# EAGLE board FlyballETS-LIGHTS (EAGLE 7.5.0)
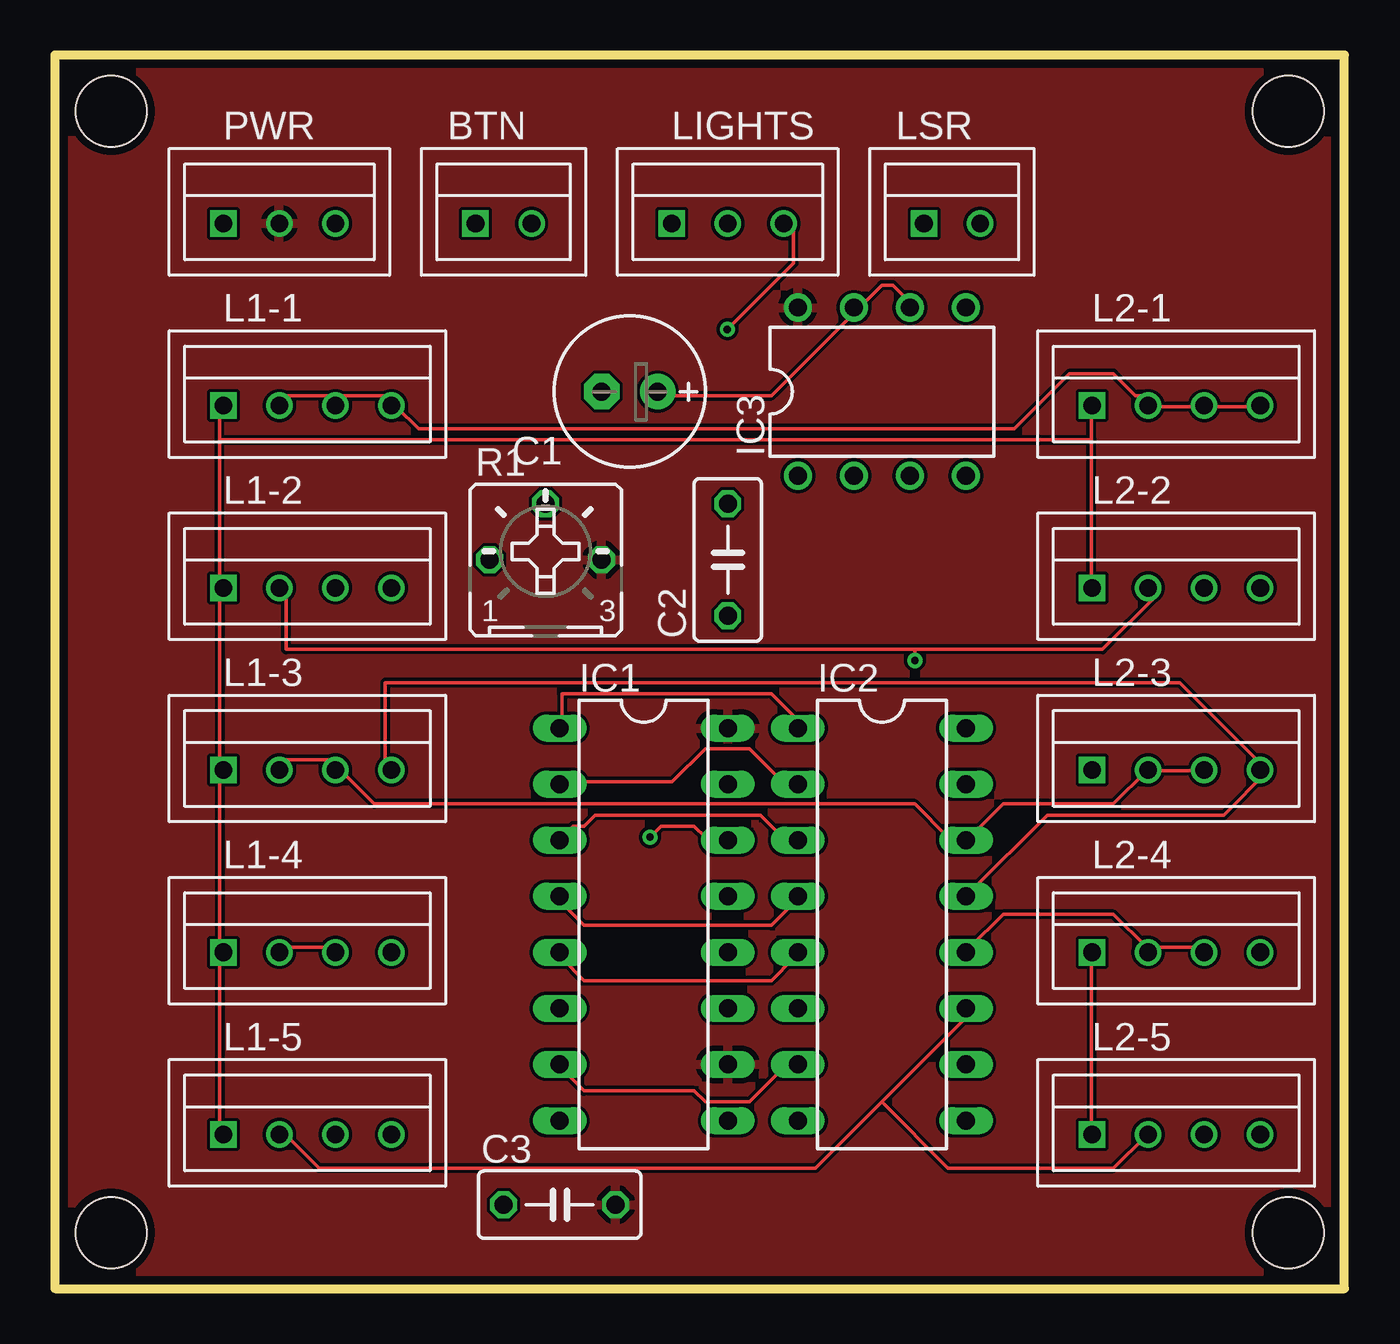
[diagram p0: board, top side]
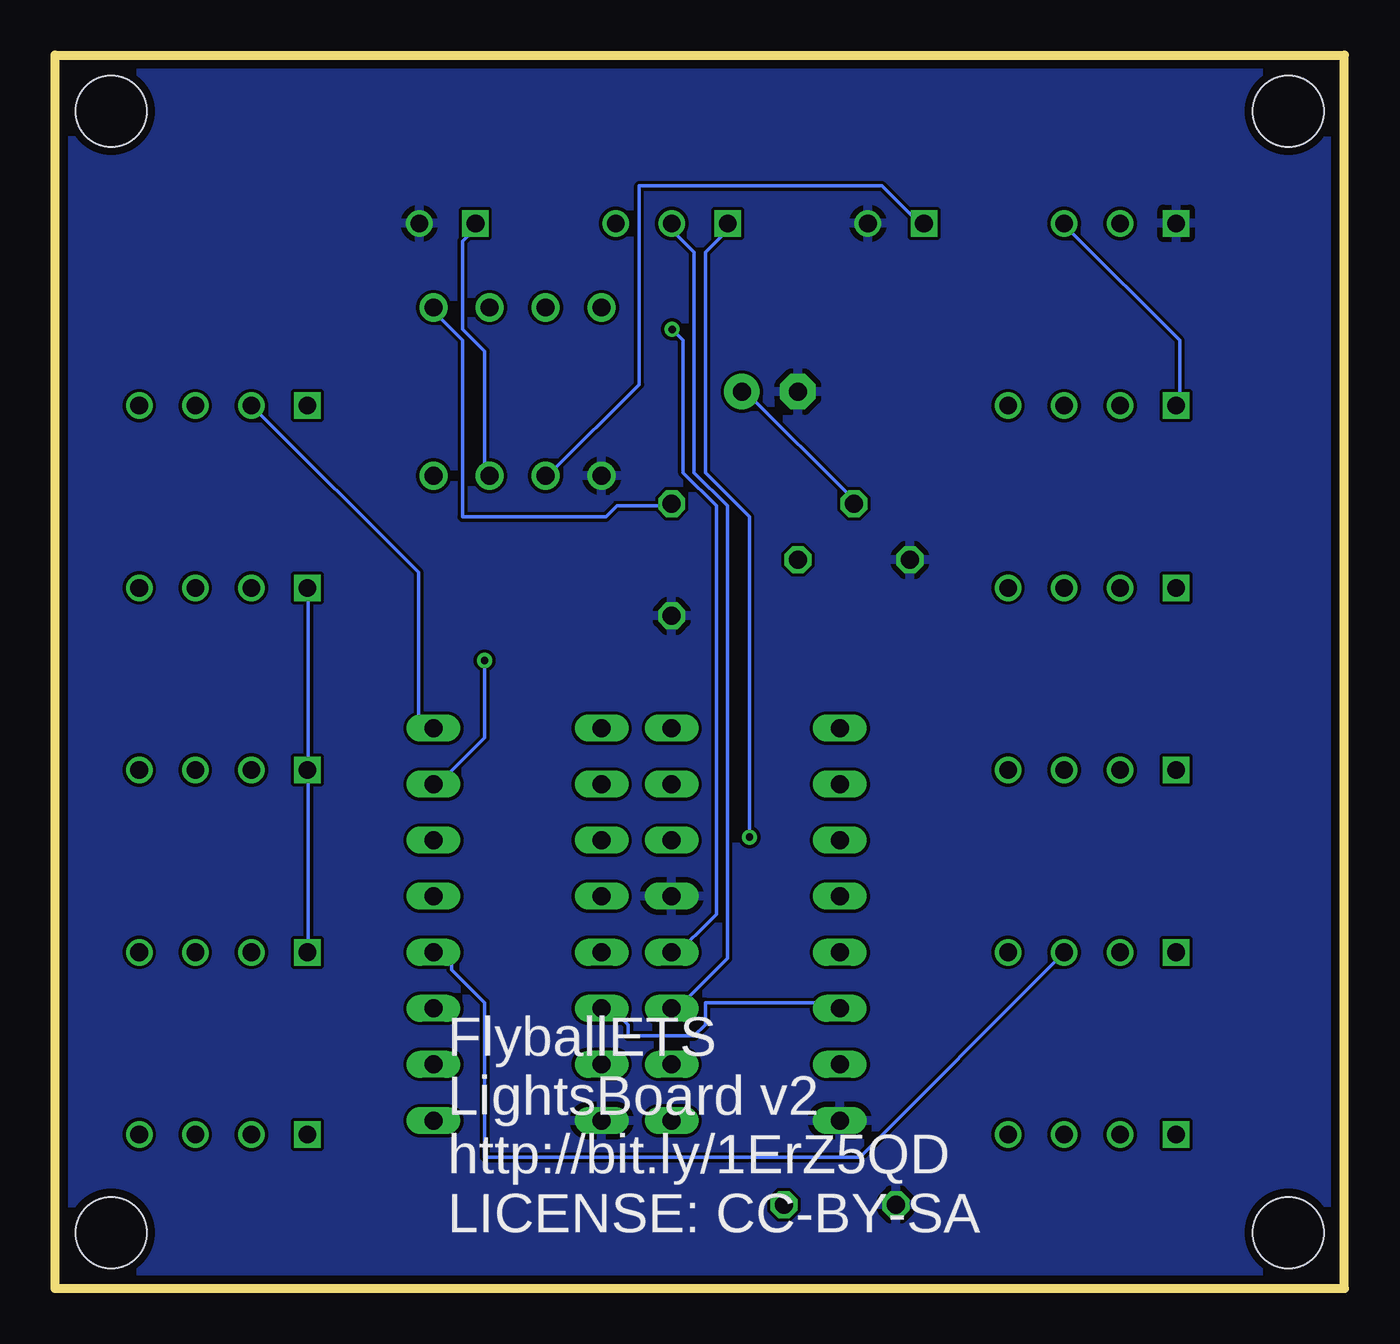
[diagram p1: board, bottom side, seen from below]

Size 58.42 x 55.88 mm. Coordinates in mm from the lower left corner, seen from the top.
Outline: 58.42,0 58.42,55.88 0,55.88 0,0 58.42,0
Copper layers (1*16): Top 0.0356mm / dielectric 1.5011mm / Bottom 0.0356mm
Design rules "LaenPCBOrder": minimum track width 6mil, minimum drill 13mil, track to track 6mil, track to pad 6mil, pad to pad 6mil, via to via 6mil, smd to smd 6mil, copper to edge 15mil, drill to drill 6mil, minimum pad ring 7mil, minimum via ring 7mil, stop-mask expansion 3mil, vias tented up to drill 0mil, thermal gap 10mil
Holes 3.2 mm at 2.54,53.34 2.54,2.54 55.88,2.54 55.88,53.34

## Footprints (pad centres in the part's own frame; a part is rotated, then mirrored left to right if it is on the bottom)
B2B-XH = drill 0.8 square: P$1 -2.54,0 | drill 0.8: P$2 0,0
E2,5-7 = drill 0.813 pad 1.6: + -1.27,0 | drill 0.813 pad 1.6 octagon: - 1.27,0
C050-030X075 = drill 0.813 octagon: 1 -2.54,0; 2 2.54,0
DIL16 = drill 0.813 long: 1 -8.89,-3.81; 2 -6.35,-3.81; 3 -3.81,-3.81; 4 -1.27,-3.81; 5 1.27,-3.81; 6 3.81,-3.81; 7 6.35,-3.81; 8 8.89,-3.81; 9 8.89,3.81; 10 6.35,3.81; 11 3.81,3.81; 12 1.27,3.81; 13 -1.27,3.81; 14 -3.81,3.81; 15 -6.35,3.81; 16 -8.89,3.81
DIL08 = drill 0.813 pad 1.27: 1 -3.81,-3.81; 2 -1.27,-3.81; 3 1.27,-3.81; 4 3.81,-3.81; 5 3.81,3.81; 6 1.27,3.81; 7 -1.27,3.81; 8 -3.81,3.81
B4B-XH = drill 0.8 square: P$1 -3.81,0 | drill 0.8: P$2 -1.27,0; P$3 1.27,0; P$4 3.81,0
B3B-XH = drill 0.8 square: P$1 -2.54,0 | drill 0.8: P$2 0,0; P$3 2.54,0
B25P = drill 0.813 octagon: A -2.54,0; E 2.54,0; S 0,2.54

## Placement (x,y rotation side)
BTN  02-JST-B2B-XH-A  [B2B-XH]  21.59,48.26 0 top
C1  100uF  [E2,5-7]  26.04,40.64 180 top
C2  10nF  [C050-030X075]  30.48,33.02 90 top
C3  100nF  [C050-030X075]  22.86,3.81 0 top
IC1  74HC595N  [DIL16]  26.67,16.51 270 top
IC2  ULN2003AN  [DIL16]  37.47,16.51 270 top
IC3  LM555N  [DIL08]  37.47,40.64 0 top
L1-1  04-JST-B4B-XH-A  [B4B-XH]  11.43,40.01 0 top
L1-2  04-JST-B4B-XH-A  [B4B-XH]  11.43,31.75 0 top
L1-3  04-JST-B4B-XH-A  [B4B-XH]  11.43,23.5 0 top
L1-4  04-JST-B4B-XH-A  [B4B-XH]  11.43,15.24 0 top
L1-5  04-JST-B4B-XH-A  [B4B-XH]  11.43,6.99 0 top
L2-1  04-JST-B4B-XH-A  [B4B-XH]  50.8,40.01 0 top
L2-2  04-JST-B4B-XH-A  [B4B-XH]  50.8,31.75 0 top
L2-3  04-JST-B4B-XH-A  [B4B-XH]  50.8,23.5 0 top
L2-4  04-JST-B4B-XH-A  [B4B-XH]  50.8,15.24 0 top
L2-5  04-JST-B4B-XH-A  [B4B-XH]  50.8,6.99 0 top
LIGHTS  03-JST-B3B-XH-A  [B3B-XH]  30.48,48.26 0 top
LSR  02-JST-B2B-XH-A  [B2B-XH]  41.91,48.26 0 top
PWR  03-JST-B3B-XH-A  [B3B-XH]  10.16,48.26 0 top
R1  1M  [B25P]  22.23,33.02 0 top
U$1  [A4L-LOC]  -78.74,-71.12 0 top  (outside the outline)

## Library data of the parts
BTN L1-1-L1-5 L2-1-L2-5 LIGHTS LSR PWR = bt_con-jst-xh
C1-C3 = resistor
IC1 = 74xx-eu
IC2 = uln-udn
IC3 = linear
R1 = pot
U$1 = frames

## Nets
+5V: C3.2 IC1.10 IC1.16 IC3.8 PWR.P$2 R1.E
+12V: L1-1.P$1 L1-2.P$1 L1-3.P$1 L1-4.P$1 L1-5.P$1 L2-1.P$1 L2-2.P$1 L2-3.P$1 L2-4.P$1 L2-5.P$1 PWR.P$3
GND: BTN.P$2 C1.- C2.1 C3.1 IC1.8 IC1.13 IC2.8 IC3.1 LSR.P$2 PWR.P$1 R1.A
N$1: IC1.14 LIGHTS.P$1
N$2: IC1.11 LIGHTS.P$2
N$3: IC1.12 LIGHTS.P$3
N$4: IC1.1 IC2.1
N$5: IC1.2 IC2.2
N$6: IC1.3 IC2.3
N$7: IC1.4 IC2.4
N$8: IC1.5 IC2.5
N$9: IC1.6 IC2.6
N$10: IC1.7 IC2.7
N$11: C1.+ IC3.6 IC3.7 R1.S
N$12: C2.2 IC3.5
N$13: IC2.16 L1-1.P$2 L1-1.P$3 L1-1.P$4 L2-1.P$2 L2-1.P$3 L2-1.P$4
N$14: BTN.P$1 IC3.2
N$15: IC3.3 LSR.P$1
N$16: IC2.15 L1-2.P$2 L2-2.P$2
N$20: IC2.14 L1-3.P$2 L1-3.P$3 L2-3.P$2 L2-3.P$3
N$22: IC2.13 L1-3.P$4 L2-3.P$4
N$24: IC2.12 L1-4.P$2 L1-4.P$3 L2-4.P$2 L2-4.P$3
N$29: IC2.11 L1-5.P$2 L2-5.P$2

## Tracks (layer width: path | path; a pad name or v marks a point on that pad's centre or on a via)
+5V
  pour Top (isolate 0.012): 0,55.88 0,0 58.42,0 58.42,55.88
+12V
  Top 0.152: L2-5.P$1 46.96,7.46 46.96,14.96 L2-4.P$1 | 46.96,38.46 46.96,31.96 L2-2.P$1 | 46.96,38.46 46.96,39.96 L2-1.P$1 | L1-5.P$1 7.46,7.46 7.46,14.96 L1-4.P$1 7.46,15.46 7.46,23.46 L1-3.P$1 7.46,23.96 7.46,31.46 L1-2.P$1 7.46,31.96 7.46,38.46 | 7.46,38.46 7.46,39.96 L1-1.P$1 | 7.46,38.46 46.96,38.46
  Bottom 0.152: L2-2.P$1 46.96,31.46 46.96,23.96 L2-3.P$1 46.96,23.46 46.96,15.46 L2-4.P$1 | PWR.P$3 12.46,47.96 7.46,42.96 7.46,40.46 L1-1.P$1
GND
  pour Bottom (isolate 0.012): 0,0 58.42,0 58.42,55.88 0,55.88
N$1  (via drill 0.33)
  Top 0.152: v26.96,20.46 27.46,20.96 28.96,20.96 29.46,20.46 30.46,20.46 IC1.14
  Bottom 0.152: v26.96,20.46 26.96,34.96 28.96,36.96 28.96,46.96 27.96,47.96 LIGHTS.P$1
N$2
  Bottom 0.152: LIGHTS.P$2 30.46,47.96 29.46,46.96 29.46,36.96 27.96,35.46 27.96,14.96 30.46,12.46 IC1.11
N$3  (via drill 0.33)
  Top 0.152: v30.46,43.46 33.46,46.46 33.46,47.96 LIGHTS.P$3
  Bottom 0.152: v30.46,43.46 29.96,42.96 29.96,36.96 28.46,35.46 28.46,16.96 30.46,14.96 IC1.12
N$4
  Top 0.152: IC1.1 22.96,25.46 22.96,26.96 32.46,26.96 33.96,25.46 IC2.1
N$5
  Top 0.152: IC1.2 22.96,22.96 27.96,22.96 29.46,24.46 31.46,24.46 32.96,22.96 33.46,22.96 IC2.2
N$6
  Top 0.152: IC1.3 22.96,20.46 23.46,20.96 23.96,20.96 24.46,21.46 31.96,21.46 32.96,20.46 33.46,20.46 IC2.3
N$7
  Top 0.152: IC1.4 22.96,17.46 23.96,16.46 32.46,16.46 33.46,17.46 IC2.4
N$8
  Top 0.152: IC1.5 22.96,14.96 23.96,13.96 32.46,13.96 33.46,14.96 IC2.5
N$9
  Bottom 0.152: IC1.6 22.96,12.96 28.96,12.96 28.96,11.96 29.46,11.46 32.46,11.46 32.46,11.96 33.46,12.96 IC2.6
N$10
  Top 0.152: IC1.7 22.96,9.96 23.96,8.96 28.96,8.96 29.46,8.46 31.46,8.46 32.96,9.96 33.46,9.96 IC2.7
N$11
  Top 0.152: IC3.6 38.96,44.46 37.96,45.46 37.46,45.46 36.46,44.46 IC3.7 35.96,43.96 32.46,40.46 27.46,40.46 C1.+
  Bottom 0.152: R1.S 22.46,35.96 26.96,40.46 C1.+
N$12
  Bottom 0.152: C2.2 30.96,35.46 32.96,35.46 33.46,34.96 39.96,34.96 39.96,42.96 40.96,43.96 IC3.5
N$13
  Top 0.152: L1-1.P$2 10.46,40.46 12.46,40.46 L1-1.P$3 12.96,40.46 14.96,40.46 L1-1.P$4 15.46,39.96 16.46,38.96 43.46,38.96 45.96,41.46 47.96,41.46 48.96,40.46 49.46,40.46 L2-1.P$2 49.96,39.96 51.96,39.96 L2-1.P$3 52.46,39.96 54.46,39.96 L2-1.P$4
  Bottom 0.152: IC2.16 41.46,25.46 41.96,25.96 41.96,32.46 49.46,39.96 L2-1.P$2
N$14
  Bottom 0.152: BTN.P$1 19.46,48.46 20.96,49.96 31.96,49.96 31.96,40.96 35.96,36.96 IC3.2
N$15
  Bottom 0.152: LSR.P$1 39.46,47.96 39.96,47.46 39.96,43.46 38.96,42.46 38.96,36.96 IC3.3
N$16  (via drill 0.33)
  Top 0.152: 38.96,28.96 47.46,28.96 49.96,31.46 L2-2.P$2 | 38.96,28.96 10.46,28.96 10.46,31.46 L1-2.P$2 | 38.96,28.96 v38.96,28.46
  Bottom 0.152: v38.96,28.46 38.96,24.96 40.96,22.96 IC2.15
N$20
  Top 0.152: L1-3.P$2 10.46,23.96 12.46,23.96 L1-3.P$3 12.96,23.46 14.46,21.96 38.96,21.96 40.46,20.46 40.96,20.46 IC2.14 41.46,20.46 42.96,21.96 47.96,21.96 49.46,23.46 L2-3.P$2 49.96,23.46 51.96,23.46 L2-3.P$3
N$22
  Top 0.152: L1-3.P$4 14.96,23.96 14.96,27.46 50.96,27.46 54.46,23.96 L2-3.P$4 54.96,23.46 52.96,21.46 44.96,21.46 41.46,17.96 IC2.13
N$24
  Top 0.152: L1-4.P$2 10.46,15.46 12.46,15.46 L1-4.P$3 | L2-4.P$3 51.96,15.46 49.96,15.46 L2-4.P$2 49.46,15.46 47.96,16.96 42.96,16.96 41.46,15.46 IC2.12
  Bottom 0.152: L1-4.P$3 12.96,14.96 21.96,5.96 38.96,5.96 38.96,12.96 40.46,14.46 40.46,14.96 40.96,15.46 IC2.12
N$29
  Top 0.152: 37.46,8.46 41.46,12.46 IC2.11 | 37.46,8.46 34.46,5.46 11.96,5.46 10.46,6.96 L1-5.P$2 | 37.46,8.46 40.46,5.46 47.96,5.46 49.46,6.96 L2-5.P$2

## Text on the board
bPlace: FlyballETS / LightsBoard v2 / http://bit.ly/1ErZ5QD / LICENSE: CC-BY-SA
Document: Alex Goris | FlyballETS / LightsBoard v2 / http://bit.ly/1ErZ5QD / LICENSE: CC-BY-SA